# Altium PCB UNO-TH_Rev3e.PcbDoc
Units mil, origin at the board's own origin, x right, y up, seen from the top; angles counter-clockwise.
Board outline 2700 x 2100 mil, 2 copper layers (Top, Bottom); 116 components, 62 nets, 312 pads, 82 vias.
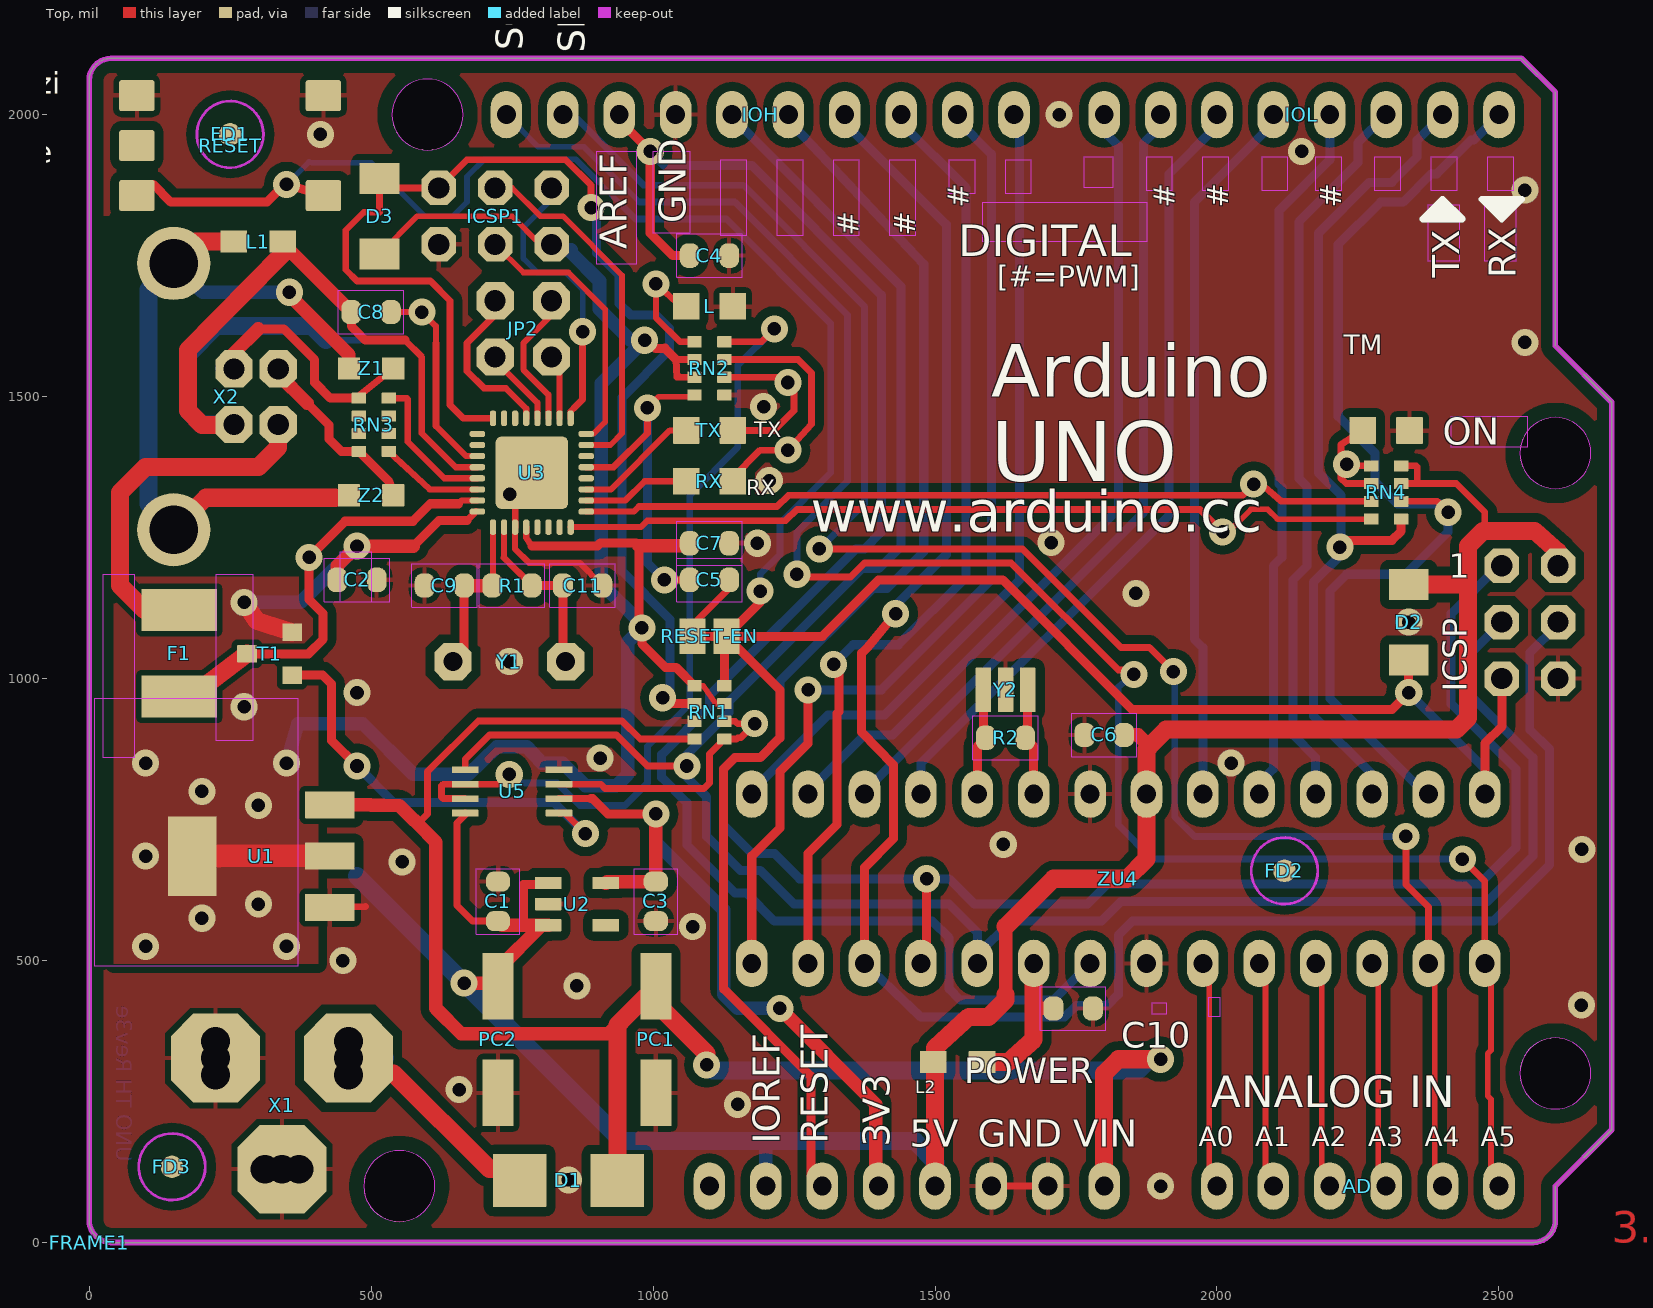
[diagram p0: Top view]
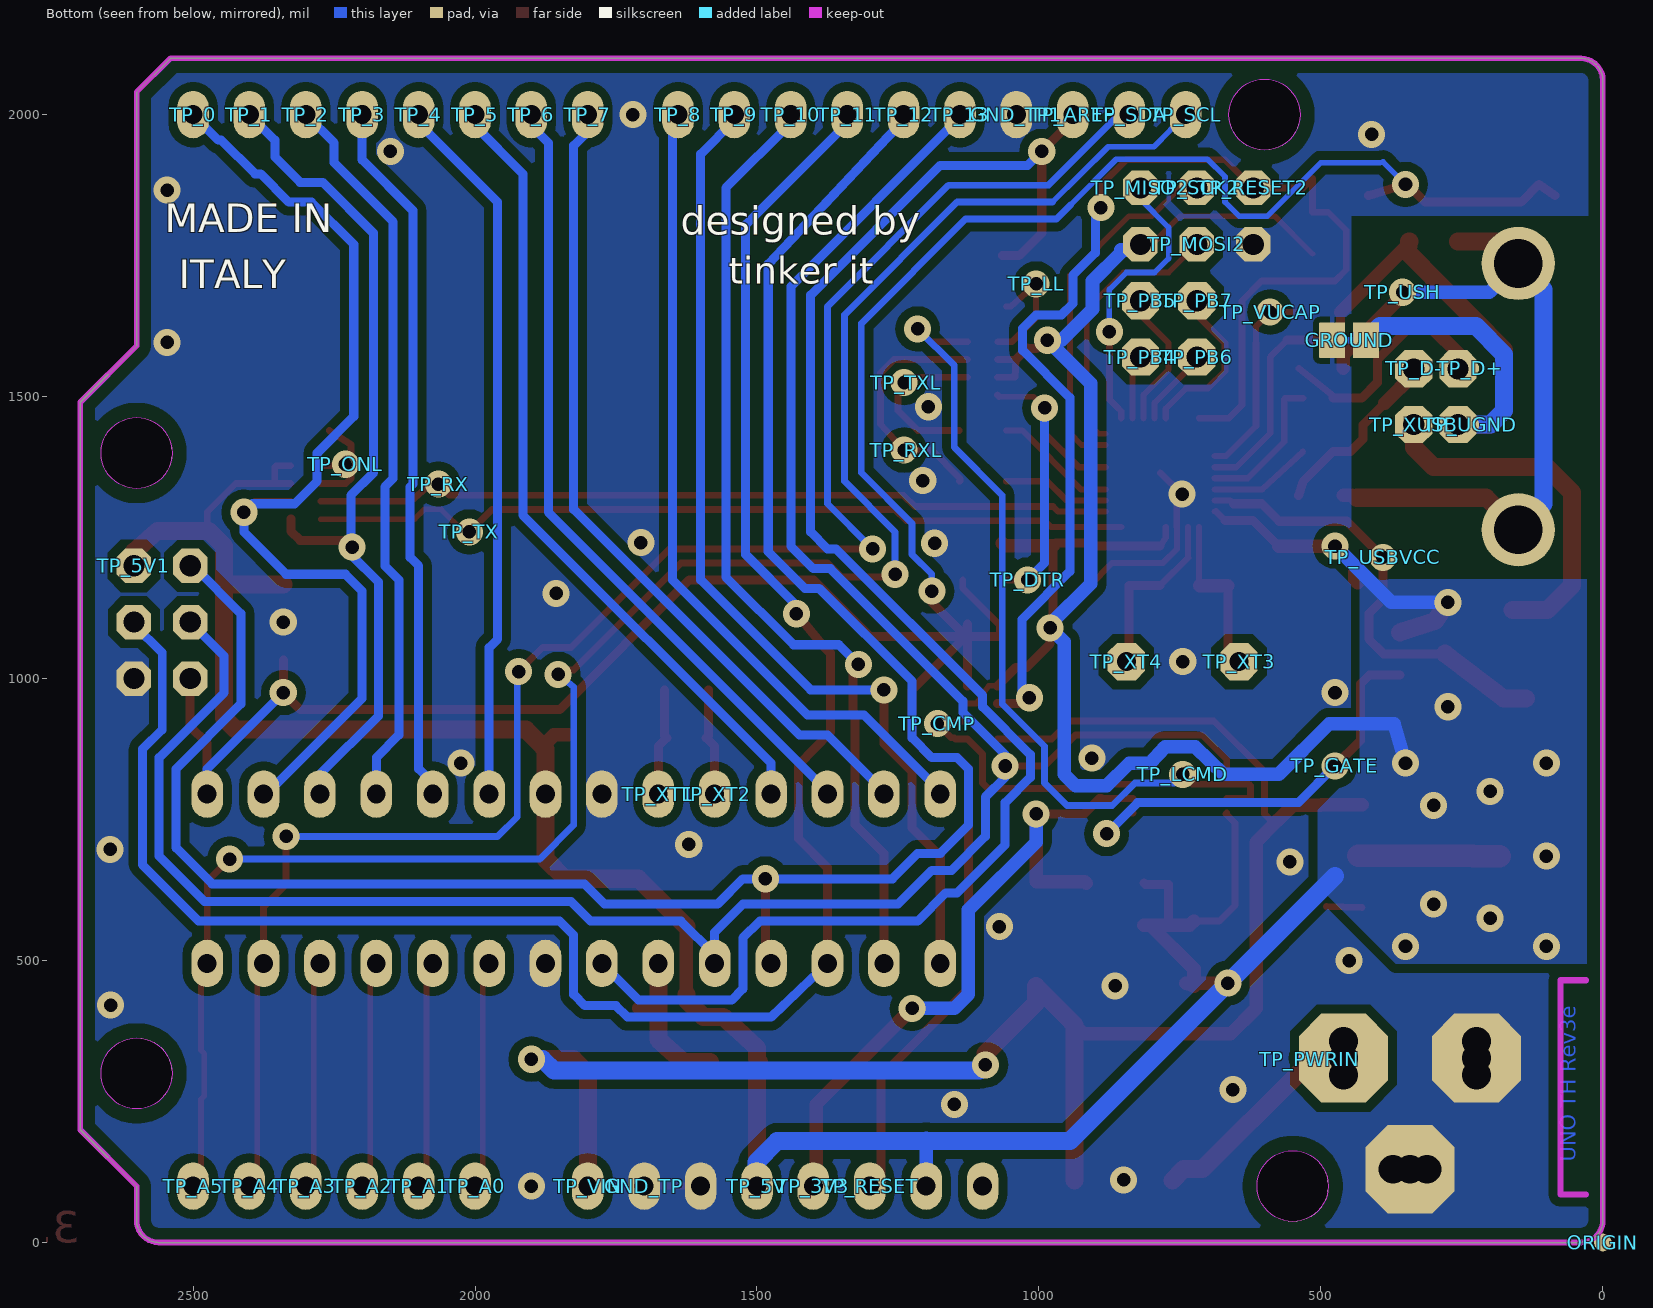
[diagram p1: Bottom view, seen from below]

## Layer stack, top to bottom
Top Solder: solder mask 0.4, Solder Resist, Dk 3.5
Top: signal copper 1.378
Dielectric 1: dielectric 12.6, FR-4, Dk 4.8
Bottom: signal copper 1.378
Bottom Solder: solder mask 0.4, Solder Resist, Dk 3.5

## Board outline
2540,2100 2600,2040 2600,1590 2700,1490 2700,200 2600,100 2600,39.37 cw(c2560.63,39.37) 2560.63,0 39.37,0 cw(c39.37,39.37) 0,39.37 0,2060.63 cw(c39.37,2060.63) 39.37,2100
cut-out: 600,1937.01 ccw(c600,2000) 662.99,2000 ccw(c600,2000) 600,2062.99 ccw(c600,2000) 537.01,2000 ccw(c600,2000)
cut-out: 550,37.01 ccw(c550,100) 612.99,100 ccw(c550,100) 550,162.99 ccw(c550,100) 487.01,100 ccw(c550,100)
cut-out: 2600,1337.01 ccw(c2600,1400) 2662.99,1400 ccw(c2600,1400) 2600,1462.99 ccw(c2600,1400) 2537.01,1400 ccw(c2600,1400)
cut-out: 2600,237.01 ccw(c2600,300) 2662.99,300 ccw(c2600,300) 2600,362.99 ccw(c2600,300) 2537.01,300 ccw(c2600,300)

## Design rules (kind name [scope] priority, off if disabled: settings)
BoardOutlineClearance mdCopperDimension [All] p1: gap=10 ignorepadtopadclearanceinfootprint=FALSE except(0: Arc-SplitContinuation Track-SplitContinuation SMDPad-SplitContinuation THPad-SplitContinuation Via-SplitContinuation Fill-SplitContinuation Poly-SplitContinuation Region-SplitContinuation Text-SplitContinuation; 26: Poly-OutlineEdge Poly-CavityEdge Poly-CutoutEdge Poly-SplitBarrior)
Clearance Clearance_for_PolygonClass_Isolate_16 [InPolygonClass('Isolate_16') vs IsArc Or IsTrack Or IsPad Or IsVia Or IsFill Or IsRegion Or IsText] p1: gap=16 ignorepadtopadclearanceinfootprint=FALSE
Clearance "Clearance (Same Net)" [All] p2: gap=10 ignorepadtopadclearanceinfootprint=FALSE except(8: SMDPad-SMDPad SMDPad-THPad SMDPad-Via)
Clearance Clearance_for_NetClass_aref [InNetClass('aref') vs InNetClass('aref')] p3: gap=10 ignorepadtopadclearanceinfootprint=FALSE
Clearance Clearance_for_NetClass_usbvcc [InNetClass('usbvcc') vs InNetClass('usbvcc')] p4: gap=10 ignorepadtopadclearanceinfootprint=FALSE
Clearance Clearance_for_NetClass_gnd [InNetClass('gnd') vs InNetClass('gnd')] p5: gap=10 ignorepadtopadclearanceinfootprint=FALSE
Clearance Clearance_for_NetClass_power [InNetClass('power') vs InNetClass('power')] p6: gap=10 ignorepadtopadclearanceinfootprint=FALSE
Clearance [All] p7: gap=10 ignorepadtopadclearanceinfootprint=FALSE except(12: THPad-Via Via-Via)
HoleSize HoleSize_For_NetClass_aref [InNetClass('aref')] p1: absolutevalues=TRUE maxlimit=24 minlimit=24 maxpercent=80.000 minpercent=20.000
HoleSize HoleSize_For_NetClass_usbvcc [InNetClass('usbvcc')] p2: absolutevalues=TRUE maxlimit=24 minlimit=24 maxpercent=80.000 minpercent=20.000
HoleSize HoleSize_For_NetClass_gnd [InNetClass('gnd')] p3: absolutevalues=TRUE maxlimit=22 minlimit=22 maxpercent=80.000 minpercent=20.000
HoleSize HoleSize_For_NetClass_power [InNetClass('power')] p4: absolutevalues=TRUE maxlimit=24 minlimit=24 maxpercent=80.000 minpercent=20.000
HoleSize [All] p5: absolutevalues=TRUE maxlimit=100000 minlimit=22 maxpercent=80.000 minpercent=20.000
HoleToHoleClearance mdDrill [All] p1: gap=12 allowstackedmicrovias=TRUE
MinimumSolderMaskSliver [All] p1 off: minsoldermaskwidth=10
PasteMaskExpansion Expansion_SMDPaste_OFF [InPadClass('SMDPaste_OFF')] p1: expansion=0
PasteMaskExpansion mlMinCreamFrame [All] p2: expansion=-2
PolygonConnect PolygonConnect_For_PolygonThermal_ON_Width80000_Gap100000 [InPolygonClass('PolygonThermal_ON_Width80000_Gap100000') vs Not IsVia] p1: connectstyle=Relief reliefconductorwidth=8 reliefentries=4 polygonreliefangle="90 Angle" airgapwidth=10
PolygonConnect PolygonConnect_For_PolygonThermal_OFF [InPolygonClass('PolygonThermal_OFF')] p2: connectstyle=Direct reliefconductorwidth=10 reliefentries=4 polygonreliefangle="90 Angle" airgapwidth=10
PolygonConnect ThermalVias [IsVia] p3: connectstyle=Direct reliefconductorwidth=10 reliefentries=4 polygonreliefangle="90 Angle" airgapwidth=10
PolygonConnect [All] p4: connectstyle=Relief reliefconductorwidth=10 reliefentries=4 polygonreliefangle="90 Angle" airgapwidth=10
RoutingVias [All] p1: holewidth=22 width=46 viastyle="Through Hole" minholewidth=22 minwidth=46 maxholewidth=100 maxwidth=100
SolderMaskExpansion Expansion_SMDSolder_OFF [InPadClass('SMDSolder_OFF')] p1: expansion=0 istentingtop=FALSE
SolderMaskExpansion mlMinStopFrame [All] p2: expansion=1 istentingtop=FALSE
Width Width_For_NetClass_aref [InNetClass('aref')] p1: maxlimit=32 minlimit=10 preferedwidth=16
Width Width_For_NetClass_usbvcc [InNetClass('usbvcc')] p2: maxlimit=40 minlimit=10 preferedwidth=20
Width Width_For_NetClass_gnd [InNetClass('gnd')] p3: maxlimit=24 minlimit=10 preferedwidth=12
Width Width_For_NetClass_power [InNetClass('power')] p4: maxlimit=48 minlimit=10 preferedwidth=24
Width [All] p5: maxlimit=10 minlimit=10 preferedwidth=10
26 further rules are at their usual default settings.

## Classes and differential pairs
polygon class PolygonThermal_ON_Width80000_Gap100000: Polygon_1_Net_GND Polygon_2_Net_GND
polygon class PolygonThermal_OFF: Polygon_1_Net_+5V Polygon_2_Net_+5V
polygon class Isolate_16: Polygon_1_Net_+5V Polygon_1_Net_GND Polygon_2_Net_GND
pad class SMDSolder_OFF: U3-33
pad class SMDPaste_OFF: GND_TP1-X GND_TP-X ORIGIN-X RESET-5 TP_0-X TP_1-X TP_2-X TP_3-X TP_3V3-X TP_4-X TP_5-X TP_5V1-X TP_5V-X TP_6-X TP_7-X TP_8-X TP_9-X TP_10-X TP_11-X TP_12-X TP_13-X TP_A0-X TP_A1-X TP_A2-X TP_A3-X TP_A4-X TP_A5-X TP_AREF-X TP_CMP-X TP_D+-X TP_D--X TP_DTR-X TP_GATE-X TP_LCMD-X TP_LL-X TP_MISO2-X TP_MOSI2-X TP_ONL-X TP_PB4-X TP_PB5-X TP_PB6-X TP_PB7-X TP_PWRIN-X TP_RESET2-X TP_RESET-X TP_RX-X TP_RXL-X TP_SCK2-X TP_SCL-X TP_SDA-X TP_TX-X TP_TXL-X TP_UGND-X TP_USBVCC-X TP_USH-X TP_VIN-X TP_VUCAP-X TP_XT1-X TP_XT2-X TP_XT3-X TP_XT4-X TP_XUSB-X U3-33
net class aref: AREF
net class usbvcc: +5V USBVCC XUSB
net class gnd: GND UGND USHIELD
net class power: PWRIN VIN

## Components (designator, comment, footprint, x,y, rotation, side; value= is the part's Value field where it differs from the comment)
AD "6x1F-H8.5" 1X06 2250,100 r0 top
C1 "100n" C0603-ROUND 725,605 r270 top
C2 "100n" C0603-ROUND 475,1175 r180 top
C3 "1u" C0603-ROUND 1005,605 r90 top
C4 "100n" C0603-ROUND 1100,1750 r180 top
C5 "100n" C0603-ROUND 1100,1175 r0 top
C6 "100n" C0603-ROUND 1800,900 r0 top
C7 "100n" C0603-ROUND 1100,1240 r0 top
C8 "1u" C0603-ROUND 500,1650 r180 top
C9 "22p" C0603-ROUND 630,1165 r180 top
C10 "100n" C0603-ROUND 1745,415 r180 top
C11 "22p" C0603-ROUND 875,1165 r0 top
D1 "M7" SMB 850,110 r180 top
D2 "CD1206-S01575" MINIMELF 2340,1100 r270 top
D3 "CD1206-S01575" MINIMELF 515,1820 r90 top
F1 "MF-MSMF050-2 500mA" L1812 160,1045 r90 top
FD1 "" FIDUCIA-MOUNT 250,1965 r0 top
FD2 "" FIDUCIA-MOUNT 2119.69,659.09 r0 top
FD3 "" FIDUCIA-MOUNT 146.85,134.25 r0 top
FRAME1 "" FRAME 0,0 r0 top
GND_TP "" TP-SP 1700,100 r0 top
GND_TP1 "" TP-SP 1040,2000 r0 top
GROUND "" SJ 450,1600 r180 bottom
ICSP "3x2 M" 2X03 2555,1100 r270 top
ICSP1 "3x2 M" 2X03 720,1820 r180 top
IOH "10x1F-H8.5" 1X10 1190,2000 r180 top
IOL "8x1F-H8.5" 1X08 2150,2000 r180 top
JP2 "2x2 M - NM" 2X02 770,1620 r90 top
L "YELLOW" CHIP-LED0805 1100,1660 r270 top
L1 "BLM21" 0805 300,1775 r180 top
L2 "10uH" 0805 1540,320 r0 top
ON "GREEN" CHIP-LED0805 2300,1440 r270 top
ORIGIN "" TP-SP 0,0 r0 top
PC1 "47u" PANASONIC_D 1005,360 r90 top
PC2 "47u" PANASONIC_D 725,360 r90 top
POWER "8x1F-H8.5" 1X08 1450,100 r0 top
R1 "1M" R0603-ROUND 750,1165 r0 top
R2 "1M" R0603-ROUND 1625,895 r180 top
RESET "TS42031-160R-TR-7260" TS42 250,1945 r0 top
RESET-EN "" SJ 1100,1075 r0 top
RN1 "10K" CAY16 1100,940 r90 top
RN2 "1K" CAY16 1100,1550 r270 top
RN3 "22R" CAY16 505,1450 r90 top
RN4 "1K" CAY16 2300,1330 r90 top
RX "YELLOW" CHIP-LED0805 1100,1350 r90 top
T1 "FDN340P" SOT-23 320,1045 r270 top
TP_0 "" TP-SP 2500,2000 r0 top
TP_1 "" TP-SP 2400,2000 r0 top
TP_2 "" TP-SP 2300,2000 r0 top
TP_3 "" TP-SP 2200,2000 r0 top
TP_3V3 "" TP-SP 1400,100 r0 top
TP_4 "" TP-SP 2100,2000 r0 top
TP_5 "" TP-SP 2000,2000 r0 top
TP_5V "" TP-SP 1500,100 r0 top
TP_5V1 "" TP-SP 2605,1200 r0 top
TP_6 "" TP-SP 1900,2000 r0 top
TP_7 "" TP-SP 1800,2000 r0 top
TP_8 "" TP-SP 1640,2000 r0 top
TP_9 "" TP-SP 1540,2000 r0 top
TP_10 "" TP-SP 1440,2000 r0 top
TP_11 "" TP-SP 1340,2000 r0 top
TP_12 "" TP-SP 1240,2000 r0 top
TP_13 "" TP-SP 1140,2000 r0 top
TP_A0 "" TP-SP 2000,100 r0 top
TP_A1 "" TP-SP 2100,100 r0 top
TP_A2 "" TP-SP 2200,100 r0 top
TP_A3 "" TP-SP 2300,100 r0 top
TP_A4 "" TP-SP 2400,100 r0 top
TP_A5 "" TP-SP 2500,100 r0 top
TP_AREF "" TP-SP 940,2000 r0 top
TP_CMP "" TP-SP 1180,920 r0 top
TP_D+ "" TP-SP 235,1550 r0 top
TP_D- "" TP-SP 335,1550 r0 top
TP_DTR "" TP-SP 1020,1175 r0 top
TP_GATE "" TP-SP 475,845 r0 top
TP_LCMD "" TP-SP 745,830 r0 top
TP_LL "" TP-SP 1005,1700 r0 top
TP_MISO2 "" TP-SP 820,1870 r0 top
TP_MOSI2 "" TP-SP 720,1770 r0 top
TP_ONL "" TP-SP 2230,1380 r0 top
TP_PB4 "" TP-SP 820,1570 r0 top
TP_PB5 "" TP-SP 820,1670 r0 top
TP_PB6 "" TP-SP 720,1570 r0 top
TP_PB7 "" TP-SP 720,1670 r0 top
TP_PWRIN "" TP-SP 520,325 r0 top
TP_RESET "" TP-SP 1300,100 r0 top
TP_RESET2 "" TP-SP 620,1870 r0 top
TP_RX "" TP-SP 2065,1345 r0 top
TP_RXL "" TP-SP 1235,1405 r0 top
TP_SCK2 "" TP-SP 720,1870 r0 top
TP_SCL "" TP-SP 740,2000 r0 top
TP_SDA "" TP-SP 840,2000 r0 top
TP_TX "" TP-SP 2010,1260 r0 top
TP_TXL "" TP-SP 1235,1525 r0 top
TP_UGND "" TP-SP 235,1450 r0 top
TP_USBVCC "" TP-SP 390,1215 r0 top
TP_USH "" TP-SP 355,1685 r0 top
TP_VIN "" TP-SP 1800,100 r0 top
TP_VUCAP "" TP-SP 590,1650 r0 top
TP_XT1 "" TP-SP 1675,795 r0 top
TP_XT2 "" TP-SP 1575,795 r0 top
TP_XT3 "" TP-SP 645,1030 r0 top
TP_XT4 "" TP-SP 845,1030 r0 top
TP_XUSB "" TP-SP 335,1450 r0 top
TX "YELLOW" CHIP-LED0805 1100,1440 r90 top
U1 "NCP1117ST50T3G" SOT223 305,685 r90 top
U2 "LP2985-33DBVR" SOT23-DBV 865,600 r270 top
U3 "ATMEGA16U2-MU(R)" MLF32 785,1365 r90 top
U5 "LMV358IDGKR" MSOP08 750,800 r90 top
X1 "POWERSUPPLY_DC21MMX" POWERSUPPLY_DC-21MM 210,330 r90 top
X2 "USB-B_TH" PN61729 150,1500 r270 top
Y1 "16MHz" QS 745,1030 r180 top
Y2 "CSTCE16M0V53-R0 16MHZ" RESONATOR 1625,980 r0 top
Z1 "CG0603MLC-05E" CT/CN0603 500,1550 r180 top
Z2 "CG0603MLC-05E" CT/CN0603 500,1325 r180 top
ZU4 "ATMEGA328P-PU" DIL28-3 1825,645 r180 top

## Footprints (in the part's own frame and the unit in brackets; to place one, negate y for a bottom-side part, rotate by r counter-clockwise, add the part's x,y. Pads: shape width x height; smd on the part's side, far side on the other; paste and mask are expansions set on the pad)
1X06 [mil] "1X06"
  oval 56x84 hole 33.46: 1(-250,0) 2(-150,0) 3(-50,0) 4(50,0) 5(150,0) 6(250,0)
1X08 [mil] "1X08"
  oval 56x84 hole 33.46: 1(-350,0) 2(-250,0) 3(-150,0) 4(-50,0) 5(50,0) 6(150,0) 7(250,0) 8(350,0)
1X10 [mil] "1X10"
  oval 56x84 hole 33.46: 1(-450,0) 2(-350,0) 3(-250,0) 4(-150,0) 5(-50,0) 6(50,0) 7(150,0) 8(250,0) 9(350,0) 10(450,0)
2X02 [mil] "2X02"
  oct 66x66 / inner round 60.98 / far side oct 66x66 hole 37.4: 1(-50,-50) 2(-50,50) 3(50,-50) 4(50,50)
2X03 [mil] "2X03"
  oct 61.02x61.02 / inner round 56.38 / far side oct 61.02x61.02 hole 37.4: 1(-100,-50) 2(-100,50) 3(0,-50) 4(0,50) 5(100,-50) 6(100,50)
0805 [mm] "0805"
  rrect5% 1.2x1 smd: 1(-1.1,0) 2(1.1,0)
C0603-ROUND [mil] "C0603-ROUND"
  rrect80% 35.37x43.31 smd: 1(-35,0) 2(35,0)
  Top keep-out lines w2: 57.99,-38.7 -57.99,-38.7 -57.99,38.7 57.99,38.7 57.99,-38.7
CAY16 [mm] "CAY16"
  rrect10% 0.5x0.65 smd: 1(-1.2,-0.675) 2(-0.4,-0.675) 3(0.4,-0.675) 4(1.2,-0.675) 5(1.2,0.675) 6(0.4,0.675) 7(-0.4,0.675) 8(-1.2,0.675)
CHIP-LED0805 [mil] "CHIP-LED0805"
  rrect4% 47.24x47.24 smd: A(0,-41.34) C(0,41.34)
CT/CN0603 [mm] "CT/CN0603"
  rrect5% 1x1 smd: 1(-1,0) 2(1,0)
DIL28-3 [mil] "DIL28-3"
  oval 56x84 hole 33.46: 1(-650,-150) 2(-550,-150) 3(-450,-150) 4(-350,-150) 5(-250,-150) 6(-150,-150) 7(-50,-150) 8(50,-150) 9(150,-150) 10(250,-150) 11(350,-150) 12(450,-150) 13(550,-150) 14(650,-150) 15(650,150) 16(550,150) 17(450,150) 18(350,150) 19(250,150) 20(150,150) 21(50,150) 22(-50,150) 23(-150,150) 24(-250,150) 25(-350,150) 26(-450,150) 27(-550,150) 28(-650,150)
FIDUCIA-MOUNT [mil] "FIDUCIA-MOUNT"
  rrect100% 40x40 smd: P$1(0,0)
  Top keep-out circle w5: c0,0 r59.06
FRAME [mil] "FRAME"
L1812 [mil] "L1812"
  rrect2% 74.8x133.86 smd: 1(-76.77,0) 2(76.77,0)
MINIMELF [mil] "MINIMELF"
  rrect3% 55.12x70.87 smd: A(66.93,0) C(-66.93,0)
MLF32 [mil] "MLF32"
  rrect80% 27.56x11.02 smd: 1(-96.46,68.9) 2(-96.46,49.21) 3(-96.46,29.53) 4(-96.46,9.84) 5(-96.46,-9.84) 6(-96.46,-29.53) 7(-96.46,-49.21) 8(-96.46,-68.9) 17(96.46,-68.9) 18(96.46,-49.21) 19(96.46,-29.53) 20(96.46,-9.84) 21(96.46,9.84) 22(96.46,29.53) 23(96.46,49.21) 24(96.46,68.9)
  rrect80% 11.02x27.56 smd: 9(-68.9,-96.46) 10(-49.21,-96.46) 11(-29.53,-96.46) 12(-9.84,-96.46) 13(9.84,-96.46) 14(29.53,-96.46) 15(49.21,-96.46) 16(68.9,-96.46) 25(68.9,96.46) 26(49.21,96.46) 27(29.53,96.46) 28(9.84,96.46) 29(-9.84,96.46) 30(-29.53,96.46) 31(-49.21,96.46) 32(-68.9,96.46)
  rrect15% 128.11x128.11 smd paste+0 mask+0: 33(0,0)
MSOP08 [mil] "MSOP08"
  rrect16% 11.81x47.24 smd: 1(-38.43,-83.19) 2(-12.83,-83.19) 3(12.76,-83.19) 4(38.35,-83.19) 5(38.35,83.15) 6(12.76,83.15) 7(-12.83,83.15) 8(-38.43,83.15)
PANASONIC_D [mm] "PANASONIC_D"
  rrect3% 3x1.4 smd: +(2.4,0) -(-2.4,0)
PN61729 [mil] "PN61729"
  oct 66x66 / inner round 60.98 / far side oct 66x66 hole 37.4: 1(49.21,185.43) 2(-49.21,185.43) 3(-49.21,106.69) 4(49.21,106.69)
  round 129.91 hole 86.61: P$1(-236.22,0) P$2(236.22,0)
POWERSUPPLY_DC-21MM [mil] "POWERSUPPLY_DC-21MM"
  oct 157.48x157.48 / inner round 145.49 / far side oct 157.48x157.48 hole 51.18: 1(-200,-132) 2(-3,-250) 3(-3,-14)
  round 76.77 hole 51.18: 4(-200,-162) 5(-200,-102) 6(-33,-14) 7(27,-14) 8(-33,-250) 9(27,-250)
QS [mil] "QS"
  oct 66x66 / inner round 60.98 / far side oct 66x66 hole 33.46: 1(-100,0) 2(100,0)
R0603-ROUND [mil] "R0603-ROUND"
  rrect80% 35.37x43.31 smd: 1(-35,0) 2(35,0)
  Top keep-out lines w2: -57.99,-38.7 57.99,-38.7 57.99,38.7 -57.99,38.7 -57.99,-38.7
RESONATOR [mm] "RESONATOR"
  rrect7% 0.7x2 smd: 1(-1,0) 2(0,0) 3(1,0)
SJ [mil] "SJ"
  rrect4% 46x63 smd: 1(-30,0) 2(30,0)
SMB [mil] "SMB"
  rrect2% 94.49x94.49 smd: A(86.61,0) C(-86.61,0)
SOT23-DBV [mil] "SOT23-DBV"
  rrect9% 21.65x47.24 smd: 1(-37.4,-51.18) 2(0,-51.18) 3(37.4,-51.18) 4(37.4,51.18) 5(-37.4,51.18)
SOT223 [mil] "SOT223"
  rrect4% 48x88 smd: 1(-91,-122) 2(0,-122) 3(91,-122)
  rrect2% 141.73x86.61 smd: 4(0,122.01)
SOT-23 [mil] "SOT-23"
  rrect6% 31x35 smd: 1(1,-40) 2(-37,40) 3(39,40)
TP-SP [mil] "TP-SP"
  rrect100% 31.5x31.5 smd far side paste+0: X(0,0)
TS42 [mil] "TS42"
  rrect15% 62.99x55.12 smd: 1(-165.35,88.58) 2(165.35,88.58) 3(-165.35,-88.58) 4(165.35,-88.58)
  rrect15% 62.99x55.12 smd paste+0: 5(-165.35,0)

## Part data
AD: library part 1X06, PackageName=1X06
C1 C2 C3 C4 C5 C6 C7 C8 C9 C10 C11: library part C0603-ROUND, PackageName=C0603-ROUND
D1: library part SMB, PackageName=SMB
D2 D3: library part MINIMELF, PackageName=MINIMELF
F1: library part L1812, PackageName=L1812
FD1 FD2 FD3: library part FIDUCIA-MOUNT, PackageName=FIDUCIA-MOUNT
FRAME1: library part FRAME, PackageName=FRAME
GND_TP GND_TP1 ORIGIN TP_0 TP_1 TP_2 TP_3 TP_3V3 TP_4 TP_5 TP_5V TP_5V1 TP_6 TP_7 TP_8 TP_9 TP_10 TP_11 TP_12 TP_13 TP_A0 TP_A1 TP_A2 TP_A3 TP_A4 TP_A5 TP_AREF TP_CMP TP_D+ TP_D- TP_DTR TP_GATE TP_LCMD TP_LL TP_MISO2 TP_MOSI2 TP_ONL TP_PB4 TP_PB5 TP_PB6 TP_PB7 TP_PWRIN TP_RESET TP_RESET2 TP_RX TP_RXL TP_SCK2 TP_SCL TP_SDA TP_TX TP_TXL TP_UGND TP_USBVCC TP_USH TP_VIN TP_VUCAP TP_XT1 TP_XT2 TP_XT3 TP_XT4 TP_XUSB: library part TP-SP, PackageName=TP-SP
GROUND RESET-EN: library part SJ, PackageName=SJ
ICSP ICSP1: library part 2X03, PackageName=2X03
IOH: library part 1X10, PackageName=1X10
IOL POWER: library part 1X08, PackageName=1X08
JP2: library part 2X02, PackageName=2X02
L ON RX TX: library part CHIP-LED0805, PackageName=CHIP-LED0805
L1 L2: library part 0805, PackageName=0805
PC1 PC2: library part PANASONIC_D, PackageName=PANASONIC_D
R1 R2: library part R0603-ROUND, PackageName=R0603-ROUND
RESET: library part TS42, PackageName=TS42
RN1 RN2 RN3 RN4: library part CAY16, PackageName=CAY16
T1: library part SOT-23, PackageName=SOT-23
U1: library part SOT223, PackageName=SOT223
U2: library part SOT23-DBV, PackageName=SOT23-DBV
U3: library part MLF32, PackageName=MLF32
U5: library part MSOP08, PackageName=MSOP08
X1: library part POWERSUPPLY_DC-21MM, PackageName=POWERSUPPLY_DC-21MM
X2: library part PN61729, PackageName=PN61729
Y1: library part QS, PackageName=QS
Y2: library part RESONATOR, PackageName=RESONATOR
Z1 Z2: library part CT/CN0603, PackageName=CT/CN0603
ZU4: library part DIL28-3, PackageName=DIL28-3

## Free pads (board coordinates)
  round 125.98 hole 125.98 unplated: MH1(2600,1400) MH2(2600,300) MH3(600,2000) MH4(550,100)

## Via types
v1: diameter 48/48 (per signal layer), hole 24, Top to Bottom, 82 vias

## Nets (pads, with @x,y where several pads share a name; then routed paths per layer and width w, separated by ;. In a path a pad name is that pad's centre, name@x,y a point inside that pad or via, vN(x,y) a via of type N, cw(c..) or ccw(c..) an arc to the next point about the centre after c; other vN are vias at no path point)
5-GND: RESET.5
+3V3: C3.2 POWER.4 TP_3V3.X U2.5 U5.2 | length 1260.5
  Top w12: U5.2 890.2,787.17
  Top w16: 890.2,787.17 892.83,787.17 920,760 v1(1005,760)
  Top w24: U2.5 918.78,640 C3.2 v1(1005,760) ; v1(1225,415) 1395,245 1395,105 POWER.4
  Bottom w24: v1(1005,760) 1005,710 1125,590 1125,440 1150,415 v1(1225,415)
+5V: C1.2 C2.2 C6.2 C7.1 D2.C D3.C ICSP1.2 ICSP.2 L2.1 PC2.+ POWER.2 POWER.5 RN1.3 RN1.5 RN2.2 RN2.3 RN4.3 RN4.4 T1.2 TP_5V1.X TP_5V.X U1.2 U1.4 U2.1 U2.3 U3.4 U3.32 U5.8 ZU4.7 | length 8643.3
  Top w10: D3.C 581.93,1820 750,1820 800,1770 ICSP1.2 ; RN1.5@1075.67,985 RN1.5 1088.76,987.24 1111.25,955.75 RN1.3
  Top w11: U3.32@686.1,1296.1 U3.32 ; U3.4 775.16,1249.84 785,1235
  Top w12: U5.8 668.43,760 652.5,744.07 652.5,597.5 680,570 C1.2 ; 670,1280 U3.32@686.1,1296.1 ; RN2.3 1042.24,1534.25 1040.75,1565.75 RN2.2 ; RN4.3 2355,1345.75 ; RN4.4 2352.76,1377.24 2355,1375 2355,1345.75 ; 2475,1262 2475,1295 2424.25,1345.75 2355,1345.75
  Top w16: 575,1235 620,1280 670,1280 ; 770,562.6 770,635 811.42,635 U2.1 ; 785,1235 901.07,1235 906.61,1240.54 970,1240.54 975,1235.54 975,1110 v1(980,1090) 980,1061.93 1021.93,1020 1040.67,1020 RN1.5 ; v1(985,1600) 1005,1585 1020.75,1585.75 1040.75,1565.75
  Top w20: U1.2 U1.2@434,686 ; ICSP.2@2600,1200 ICSP.2
  Top w24: C2.2@435,1170 C2.2 440,1200 v1(475,1235) 575,1235 ; v1(665,460) 739.49,460 PC2.+ 725,485 802.6,562.6 U2.3 770,562.6 732.4,562.6 C1.2 ; 975,1235.54 1060.54,1235.54 C7.1 ; 1625,440 1625,560 ; C6.2 1860,900 1880,880
  Top w32: v1(275,1135) 298,1102 T1.2 ; POWER.5 1500,316.69 L2.1 1500,326.69 1500,345 1560,400 1595,400 1625,430 1625,440 ; 1625,560 1710,645 1840,645 1875,680 ZU4.7 1875,875 1880,880 1910,910 2425,910 2445,930 2445,1160 ; D2.C 2438.07,1166.93 2445,1160 ; ICSP.2@2605,1198.54 ICSP.2 2605,1225 2563,1262 2475,1262 2472,1262 2445,1235 2445,1160
  Top w40: U1.4 230,685 231,686 U1.2@434,686
  Bottom w24: v1(275,1135) 375,1135 v1(475,1235) ; v1(350,850) 370,920 485,920 575,830 672,830 723,879 776,879 803,850 840,850 880,810 935,810 955,830 955,1065 v1(980,1090) 980,1096.6 908.3,1168.3 908.3,1523.3 v1(985,1600) 960,1600 905,1655 905,1705 855,1755 855,1760 830,1760 ICSP1.2 ; POWER.2 1200,185 1205,180
  Bottom w32: 475,650 v1(665,460) 945,180 1205,180 1464,180 1501,143 POWER.5
  other v1: 100,525 350,525 200,575 300,600 100,685 300,775 200,800 100,850 275,950
AD0: AD.1 TP_A0.X ZU4.23 | length 403.2
  Top w10: ZU4.23 1986,479 1986,118 AD.1
AD1: AD.2 TP_A1.X ZU4.24 | length 403.2
  Top w10: ZU4.24 2086,479 2086,118 AD.2
AD2: AD.3 TP_A2.X ZU4.25 | length 403.2
  Top w10: ZU4.25 2186,479 2186,118 AD.3
AD3: AD.4 TP_A3.X ZU4.26 | length 403.2
  Top w10: ZU4.26 2286,479 2286,118 AD.4
AD4/SDA: AD.5 IOH.9 TP_A4.X TP_SDA.X ZU4.27 | length 3192.3
  Top w10: ZU4.27 2386,479 2386,118 AD.5
  Top w12: v1(1295,1230) 1655,1230 1830,1055 1880,1055 v1(1922.5,1012.5) v1@1930,1010 ; v1(2335,720) 2335,635 2375,595 ZU4.27
  Bottom w12: IOH.9 858,2000 983,1875 1160,1875 1375,1660 1375,1310 v1(1295,1230) ; v1(1922.5,1012.5) 1925,1010 1925,755 1960,720 v1(2335,720)
AD5/SCL: AD.6 IOH.10 TP_A5.X TP_SCL.X ZU4.28 | length 3469.1
  Top w10: ZU4.28 2486,479 2486,341 2480,335 2480,260 2486,254 2486,118 AD.6
  Top w12: v1(1255,1185) 1255,1180 1350,1180 1375,1205 1635,1205 1825,1015 1845,1015 v1(1852.5,1007.5) ; v1(2435,680) 2475,640 ZU4.28
  Bottom w10: IOH.10 796,1943 877,1943 976,1845
  Bottom w12: 976,1845 1145,1845 1345,1645 1345,1350 1255,1260 v1(1255,1185) ; v1(1852.5,1007.5) 1825,985 1825,740 1885,680 v1(2435,680)
AREF: C4.2 IOH.8 TP_AREF.X ZU4.21 | length 2907.5
  Top w16: IOH.8 940,1990 v1(995,1935) 995,1790 1035,1750 C4.2
  Bottom w16: v1(995,1935) 1020,1910 1175,1910 1405,1680 1405,1260 1375,1230 1360,1230 1100,970 1100,950 1015,865 1015,825 1060,780 1060,705 1145,620 1165,620 1215,570 1495,570 1525,540 1525,450 1545,430 1710,430 ZU4.21
AVCC: C10.2 L2.2 ZU4.20 | length 276.9
  Top w24: 1675,415 C10.2
  Top w32: L2.2 1630,320 1675,360 1675,415 ZU4.20
CMP: RN1.1 RN1.2 TP_CMP.X U5.3 | length 482.8
  Top w12: U5.3 907.24,812.76 915,805 1090,805 1100,815 1100,866.18 RN1.1 1147.76,892.76 1150,895 1155,895 v1(1180,920) 1150,920 1145.75,924.25 RN1.2
D+: RN3.5 TP_D+.X X2.3 Z1.1 | length 447.6
  Top w12: RN3.5 476.18,1500 Z1.1
  Top w16: 300,1620 345,1620 400,1565 400,1525 427.76,1497.24 RN3.5
  Top w24: X2.3 256.69,1576.69 300,1620
  Bottom w24: TP_D+.X 255.91,1550 X2.3
D-: RN3.8 TP_D-.X X2.2 Z2.1 | length 325.7
  Top w16: 386.54,1488.46 425,1450 425,1425 447.24,1402.76 RN3.8 531.18,1350 Z2.1
  Top w24: X2.2 335.79,1539.21 386.54,1488.46
  Bottom w12: TP_D-.X 335,1549.65 X2.2
DTR: C5.1 RN2.4 TP_DTR.X U3.13 | length 633.7
  Top w10: v1(990,1480) 1010,1500 RN2.4@1070.67,1500
  Top w11: U3.13 929.84,1374.84
  Top w12: 929.84,1374.84 990,1435 v1(990,1480) ; v1(1020,1175) C5.1 ; RN2.4@1070.67,1500 RN2.4
  Bottom w16: v1(990,1480) 990,1205 v1(1020,1175)
GATE_CMD: T1.3 TP_GATE.X U5.1 | length 756.9
  Top w12: U5.1 843.43,761.57 v1(880,725)
  Top w16: T1.3 414,1006 430,990 430,890 v1(475,845)
  Bottom w16: v1(475,845) 540,780 825,780 v1(880,725)
GND: C1.1 C2.1 C3.1 C4.1 C6.1 C7.2 C9.2 C10.1 C11.2 GND_TP1.X GND_TP.X GROUND.1 ICSP1.6 ICSP.6 IOH.7 L.C ON.C PC1.- PC2.- POWER.6 POWER.7 RESET.1 RESET.2 RN1.7 RN2.5 U1.1 U2.2 U3.3 U3.33 U5.4 X1.1 X1.3 X1.4 X1.5 X1.6 X1.7 Y2.2 ZU4.8 ZU4.22 | length 557.5
  Top w11: U3.3@755,1270 755,1230 780,1205 870,1205 C11.2
  Top w12: U1.1 490,596 ; U3.3 755.47,1319.53 v1(746,1327) U3.33 ; POWER.6 POWER.7
  Bottom w12: 425,1600 GROUND.1
  other v1: 1900,100 850,111 1150,245 656,271 2646,421 865,455 450,500 1070,560 555,675 2647,697 1621,706 2025,850 906,859 475,975 745,1030 2340,1100 1856,1151 1185,1240 1706,1241 1206,1351 1196,1482 2546,1596 2546,1866 2150,1935 410,1965 1720,2000
IO0: IOL.1 RN4.2 TP_0.X ZU4.2 | length 1795.3
  Top w12: RN4.2 2390.75,1314.25 v1(2410,1295)
  Bottom w16: ZU4.2 2370,795 2200,965 2200,1155 2230,1185 2335,1185 2410,1260 v1(2410,1295) 2395,1310 2320,1310 2280,1350 2280,1400 2215,1465 2215,1770 2290,1845 2330,1845 2380,1895 2390,1895 2450,1955 2455,1955 IOL.1
IO1: IOL.2 RN4.1 TP_1.X ZU4.3 | length 1542.2
  Top w16: v1(2218,1233) 2230,1245 2310,1245 2326.57,1261.57 RN4.1
  Bottom w16: ZU4.3 2275,830 2171,934 2171,1171 2220,1220 2220,1225 v1(2218,1233) 2220,1235 2220,1325 2180,1365 2180,1790 2270,1880 2310,1880 2355,1925 2355,1955 IOL.2
IO2: IOL.3 TP_2.X ZU4.4 | length 1302.3
  Bottom w16: ZU4.4 2175,860 2135,900 2135,1175 2160,1200 2160,1340 2145,1355 2145,1810 2250,1915 2250,1950 IOL.3
IO3: IOL.4 TP_3.X ZU4.5 | length 1260.9
  Bottom w16: ZU4.5 2075,815 2100,840 2100,1200 2115,1215 2115,1340 2110,1345 2110,1830 2200,1920 IOL.4
IO4: IOL.5 TP_4.X ZU4.6 | length 1267.7
  Bottom w16: ZU4.6 1975,1055 1960,1070 1960,1845 2095,1980 IOL.5
IO5: IOL.6 TP_5.X ZU4.11 | length 1422.5
  Bottom w16: ZU4.11 1475,850 1915,1290 1915,1895 2000,1980 IOL.6
IO6: IOL.7 TP_6.X ZU4.12 | length 1422.5
  Bottom w16: ZU4.12 1375,800 1870,1295 1870,1950 1900,1980 IOL.7
IO7: IOL.8 TP_7.X ZU4.13 | length 1472.5
  Bottom w16: ZU4.13 1275,800 1375,900 1425,900 1825,1300 1825,1945 1800,1970 IOL.8
IO8: IOH.1 TP_8.X ZU4.14 | length 1484.5
  Bottom w16: ZU4.14 1175,800 1310,935 1410,935 1650,1175 1650,1990 1640,1980 IOH.1
IO9: IOH.2 TP_9.X ZU4.15 | length 1782
  Top w16: ZU4.15 1175,685 1225,735 1225,835 1275,885 v1(1275,980)
  Bottom w16: v1(1275,980) 1405,980 1600,1175 1600,1930 1540,1990 IOH.2
L13: RN2.8 TP_LCMD.X U5.6 U5.7 | length 1471.7
  Top w12: U5.7 627.83,787.17 625,790 625,810 627.76,812.76 U5.6 727.76,812.76 v1(745,830) ; RN2.8 1192.24,1597.24 v1(1215,1620)
  Bottom w12: v1(745,830) 760,815 830,815 870,775 950,775 990,815 990,880 1065,955 1065,1325 1150,1410 1150,1555 v1(1215,1620)
M8RXD: RN4.7 TP_RX.X U3.9 | length 1423.6
  Top w11: U3.9 966.1,1296.1 975,1305
  Top w12: 975,1305 1220,1305 1240,1325 2045,1325 v1(2065,1345) 2078.5,1345 2114.25,1314.25 RN4.7
M8TXD: RN4.8 TP_TX.X U3.8 | length 1472.8
  Top w10: v1(2010,1260) 2020,1260 2060,1300 2090,1300 2107.24,1282.76 RN4.8
  Top w11: U3.8 978.54,1268.54 990,1280
  Top w12: 990,1280 1235,1280 1255,1300 1970,1300 v1(2010,1260)
MISO: ICSP.1 IOH.5 TP_12.X ZU4.18 | length 3805.3
  Top w16: ZU4.18 1485,505 v1(1485,645)
  Bottom w16: IOH.5 1240,1990 1480,1735 1480,1225 1415,1160 1390,1160 1225,995 1225,895 1190,860 1145,860 1125,840 1125,740 1175,690 1215,690 1260,645 v1(1485,645) ; v1@1490,640 1490,635 v1(1485,645) ; ICSP.1 2498.03,1198.03 2415,1115 2415,955 2530,840 2530,700 2466,636 1806,636 1770,600 1570,600 1525,645 v1(1485,645)
MISO2: ICSP1.1 TP_MISO2.X U3.17 | length 570.8
  Top w10: 875,1555 v1(875,1615)
  Top w11: U3.17 853.9,1473.9 860,1480
  Top w12: 860,1480 875,1495 v1(875,1615)
  Bottom w10: ICSP1.1 820,1850 770,1800 770,1745 795,1720 845,1720 875,1690 v1(875,1615)
MOSI: ICSP.4 IOH.4 TP_11.X ZU4.17 | length 3575.1
  Top w16: ZU4.17 1375,665 1426,716 1426,847 1370,905 1370,1045 1380,1055 v1(1430,1115)
  Bottom w15: 2555,909 2555,1046
  Bottom w16: IOH.4 1340,1985 1520,1805 1520,1220 1430,1130 v1(1430,1115) ; ZU4.17 1475,400 1730,400 1750,420 1805,420 1825,440 1825,545 1850,570 2490,570 2590,670 2590,875 2555,909 ; 2555,1046 2605.51,1095.51 ICSP.4
MOSI2: ICSP1.4 TP_MOSI2.X U3.16 | length 484.9
  Top w10: ICSP1.4 770,1720 850,1720 915,1655 915,1455 893.9,1433.9 U3.16
N$1: L.A RN2.1 TP_LL.X | length 215
  Top w11: L.A 1050,1660 v1(1005,1700) 1005,1640 1047.76,1597.24 RN2.1
N$3: ON.A RN4.5 RN4.6 TP_ONL.X | length 221.2
  Top w12: ON.A 2220,1415 v1@2220,1390 ; RN4.6 2229.25,1345.75 2220,1355 v1@2220,1390 ; RN4.5 2242.76,1377.24 v1(2230,1380) v1@2220,1390
N$35: RN2.7 RX.A TP_RXL.X | length 443.6
  Top w12: RN2.7 1257.25,1565.75 1281,1542 1281,1451 v1(1239,1405) 1190,1405 1140,1355 1140,1350 RX.A
N$36: RN2.6 TP_TXL.X TX.A | length 292.2
  Top w12: RN2.6 1225.75,1534.25 v1(1239,1525) 1250,1510 1250,1475 1214.76,1439.76 1151.57,1439.76 TX.A
PB4: JP2.1 TP_PB4.X U3.18 | length 114.4
  Top w11: U3.18 JP2.1@834.21,1555.79
  Top w12: JP2.1 JP2.1@834.21,1555.79
PB5: JP2.3 TP_PB5.X U3.19 | length 247.7
  Top w11: U3.19 814.53,1503.47 770,1548 770,1595 JP2.3@820,1645
  Top w12: JP2.3@820,1645 JP2.3
PB6: JP2.2 TP_PB6.X U3.20 | length 139.5
  Top w11: JP2.2 720,1564 794.84,1489.16 U3.20
PB7: JP2.4 TP_PB7.X U3.21 | length 295.7
  Top w11: 700,1515 739,1515 775.16,1478.84 U3.21
  Top w12: 700,1515 670,1545 670,1595 720,1645 JP2.4
PWRIN: D1.A TP_PWRIN.X X1.2 X1.8 X1.9 | length 459.9
  Top w32: X1.2 487,300 540,300 710,130 743.39,130 D1.A
  Bottom w32: X1.2 462,325 TP_PWRIN.X 523,325 X1.2@525,327
RD+: RN3.4 U3.29 | length 259.8
  Top w11: 565,1420 629.84,1355.16 U3.29
  Top w12: RN3.4 562.76,1497.24 565,1495 565,1420
RD-: RN3.1 U3.30 | length 184.6
  Top w10: RN3.1 RN3.1@532.72,1402.76
  Top w11: RN3.1 603.86,1335.47 U3.30
RESET: C5.2 D2.A ICSP.5 POWER.3 RESET-EN.1 RESET-EN.2 RESET.3 RESET.4 RN1.4 TP_RESET.X ZU4.1 | length 5550.2
  Top w12: RESET-EN.1 1070,1095 1135,1160 C5.2
  Top w16: RESET.3 113.58,1876.42 145,1845 315,1845 345,1875 v1(350,1876.42) RESET.4 ; RESET-EN.1 RESET-EN.2 ; RN1.4 1126.57,1096.57 RESET-EN.2 ; v1(1190,1155) 1190,1135 RESET-EN.2 ; POWER.3 1280,120 1280,295 1125,450 1125,840 1145,860 1190,860 1225,895 1225,980 RESET-EN.2 ; D2.A v1(2340,975) 2310,945 1850,945 1620,1175 1400,1175 1300,1075 RESET-EN.2 ; ZU4.1 2475,885 2505.51,915.51 ICSP.5
  Bottom w10: v1(350,1876.42) 389.58,1916 395.58,1915 500,1915 595,1820 645,1820 670,1845 670,1890 701,1921 863,1921 944,1840
  Bottom w12: 944,1840 969,1815 1130,1815 1315,1630 1315,1365 1225,1275 1225,1220 1190,1185 v1(1190,1155)
  Bottom w16: v1(2340,975) 2475,840 ZU4.1
RESET2: D3.A ICSP1.5 RN1.6 TP_RESET2.X U3.24 | length 2232.3
  Top w11: 663.54,1461.46 U3.24
  Top w12: 663.54,1461.46 640,1485 640,1670 605,1705 475,1705 455,1725 455,1795 486.93,1826.93 515,1826.93 D3.A 531.93,1870 ICSP1.5 670,1920 845,1920 890,1875 v1(890,1835)
  Top w16: v1(1017,966) 1017.25,965.75 1030,955 1030.75,955.75 RN1.6
  Bottom w16: v1(890,1835) 900,1825 900,1755 940,1715 940,1665 960,1645 1005,1645 1029,1621 1029,1582 945,1498 945,1190 1030,1105 1030,979 v1(1017,966)
RXLED: RX.C U3.10 | length 191.4
  Top w11: U3.10 950.79,1315.79 985,1350 RX.C
SCK: ICSP.3 IOH.6 TP_13.X U5.5 ZU4.19 | length 4196.4
  Top w12: U5.5 666.85,856.85 710,900 935,900 990,845 v1(1060,845)
  Bottom w16: IOH.6 1140,1995 1440,1695 1440,1235 1400,1195 1370,1195 1135,960 1135,940 1060,865 v1(1060,845) 1060,825 1095,790 1095,720 1155,660 1190,660 1250,600 1525,600 1575,550 ZU4.19@1575,510 ; ZU4.19 ZU4.19@1575,510 ; ICSP.3 2445,1040 2445,975 2560,860 2560,685 2480,605 1830,605 1795,570 1635,570 ZU4.19@1575,510
SCK2: ICSP1.3 TP_SCK2.X U3.15 | length 641.4
  Top w10: ICSP1.3 750,1870 800,1820 840,1820 945,1715 945,1435 924.21,1414.21 U3.15
SS: IOH.3 TP_10.X ZU4.16 | length 1723.8
  Top w16: ZU4.16 1275,690 1326,741 1326,938 1330,942 1330,1015 v1(1320,1025)
  Bottom w16: v1(1320,1025) 1355,1060 1435,1060 1555,1180 1555,1870 1440,1985 IOH.3
TP_VUCAP: C8.1 TP_VUCAP.X U3.27 | length 363
  Top w11: C8.1 v1(590,1650) 615,1625 615,1595 ; 615,1448 668.47,1394.53 U3.27
  Top w12: 615,1448 615,1595
TXLED: TX.C U3.11 | length 220.5
  Top w11: U3.11 925.47,1335.47 1030,1440 TX.C
UGND: C8.2 GROUND.2 L1.1 TP_UGND.X U3.28 X2.4 | length 1559.4
  Top w11: 590,1435 650.16,1374.84 U3.28
  Top w12: 560,1600 590,1570 590,1435
  Top w16: C8.2 465,1625 490,1600 560,1600
  Top w24: L1.1 343.31,1771.69 C8.2
  Top w32: X2.4 255.91,1450 200,1450 175,1475 175,1583 346.31,1756.31 L1.1
  Bottom w24: TP_UGND.X 255.91,1450 X2.4
  Bottom w32: X2.4 199.21,1450.79 175,1475 175,1575 225,1625 395,1625 GROUND.2
USBVCC: F1.1 T1.1 TP_USBVCC.X U3.31 | length 834.7
  Top w11: 655,1310 660.79,1315.79 U3.31
  Top w16: T1.1 389,1044 415,1070 415,1115 390,1140 v1(390,1215) 454,1279 574,1279 605,1310 655,1310
  Top w24: F1.1@136.77,965 F1.1
  Top w32: F1.1@136.77,965 176,965 T1.1
USHIELD: L1.2 TP_USH.X X2.P$1 X2.P$2 Z1.2 Z2.2 | length 1373.4
  Top w24: v1(355,1685) 355,1680 460.63,1574.37 Z1.2 ; 435.63,1320.63 440.63,1320.63 445,1325 Z2.2
  Top w32: X2.P$2 206.85,1320.63 435.63,1320.63 ; X2.P$1 188.78,1775 L1.2
  Bottom w24: X2.P$1 201.22,1685 v1(355,1685)
  Bottom w32: X2.P$2 150,1265 105,1310 105,1690 150,1735 X2.P$1
VIN: D1.C PC1.+ POWER.8 RN1.8 TP_VIN.X U1.3 | length 3221.1
  Top w12: 582.5,742.5 600,760 600,835 690,925 945,925 977.24,892.76 RN1.8
  Top w24: U1.3 498.76,776 550,774.76 ; 500,775 550,774.76 ; 942.76,392.24 920.51,370 660,370 615,415 615,710 582.5,742.5 575,750 550,774.76 ; PC1.+ PC1.+@1005.51,450
  Top w32: D1.C 936.61,386.1 942.76,392.24 PC1.+ 1005,425 1095,335 v1(1095,315) ; POWER.8 1800,300 1825,325 v1(1900,325)
  Bottom w32: v1(1095,315) 1105,305 1860,305 1880,325 v1(1900,325)
XT1: C9.1 R1.1 TP_XT3.X U3.1 Y1.2 | length 311.3
  Top w10: R1.1 R1.1@720,1170
  Top w11: R1.1@716.1,1171.1 U3.1
  Top w12: R1.1 R1.1@716.1,1171.1
  Top w16: Y1.2 650,1050 665,1050 C9.1
  Top w24: C9.1 R1.1
XT2: C11.1 R1.2 TP_XT4.X U3.2 Y1.1 | length 316
  Top w11: 735.79,1214.21 U3.2
  Top w12: 735.79,1214.21 R1.2
  Top w16: R1.2 C11.1 840,1055 845,1050 Y1.1
XTAL1: R2.1 TP_XT1.X Y2.3 ZU4.9 | length 193
  Top w16: Y2.3 1664.37,899.37 R2.1 1675,880 ZU4.9
XTAL2: R2.2 TP_XT2.X Y2.1 ZU4.10 | length 193
  Top w16: ZU4.10 1575,880 R2.2 1585.63,899.37 Y2.1
XUSB: F1.2 TP_XUSB.X X2.1 | length 642.8
  Top w32: F1.2 98.23,1121.77 55,1165 55,1330 100,1375 300,1375 335,1410 X2.1
  Bottom w12: TP_XUSB.X 335,1450.35 X2.1
pads on no net: FD1.P$1 FD2.P$1 FD3.P$1 ORIGIN.X POWER.1 RN3.2 RN3.3 RN3.6 RN3.7 U2.4 U3.5 U3.6 U3.7 U3.12 U3.14 U3.22 U3.23 U3.25 U3.26

## Polygon pours and split planes (outlines as drawn)
GND on Bottom "Polygon_1_Net_GND" (solid, remove dead copper, pour order 2): 21,2079 2666.66,2079 2679,2066.66 2679,21 33.34,21 21,33.34 21,1189 446,1189 446,1821 21,1821
+5V on Bottom "Polygon_1_Net_+5V" (solid, pour order 1): 29,1176 431,1176 431,842.49 506,767.49 506,632.51 367.49,494 29,494
GND on Top "Polygon_2_Net_GND" (solid, remove dead copper, pour order 3): 21,2079 2679,2079 2679,21 21.02,21 15.98,1204 446,1204 446,1821 21,1821
+5V on Top "Polygon_2_Net_+5V" (solid, remove dead copper, pour order 0): 44,494 44,1181 406,1181 406,494

## Keep-outs
Top:
  region: 10,490 10,965 370,965 370,490
  region: 1625,1860 1625,1920 1670,1920 1670,1860
  region: 2480,1865 2480,1925 2525,1925 2525,1865
  region: 2380,1865 2380,1925 2425,1925 2425,1865
  region: 2280,1865 2280,1925 2325,1925 2325,1865
  region: 2175,1865 2175,1925 2220,1925 2220,1865
  region: 2080,1865 2080,1925 2125,1925 2125,1865
  region: 1975,1865 1975,1925 2020,1925 2020,1865
  region: 1875,1865 1875,1925 1920,1925 1920,1865
  region: 1765,1870 1765,1925 1815,1925 1815,1870
  region: 445,1135 445,1225 500,1225 500,1135
  region: 1985,400 1985,435 2005,435 2005,400
  region: 1885,405 1885,425 1910,425 1910,405
  region: 225,890 225,1185 290,1185 290,890
  region: 25,860 25,1185 80,1185 80,860
  region: 2415,1410 2415,1465 2550,1465 2550,1410
  region: 2475,1740 2475,1840 2530,1840 2530,1740
  region: 2375,1740 2375,1840 2430,1840 2430,1740
  region: 1585,1775 1585,1845 1875,1845 1875,1775
  region: 1525,1860 1525,1920 1570,1920 1570,1860
  region: 1420,1785 1420,1920 1465,1920 1465,1785
  region: 1320,1785 1320,1920 1365,1920 1365,1785
  region: 1220,1785 1220,1920 1265,1920 1265,1785
  region: 1120,1785 1120,1920 1165,1920 1165,1785
  region: 1000,1790 1000,1935 1065,1935 1065,1790
  region: 900,1735 900,1935 970,1935 970,1735
Bottom:
  lines w11: 30,85 75,85 75,465 30,465
Keep-Out Layer:
  the board outline again, w10

## Other copper
Top:
  text "3.325" at 2700,0 h56.1
Bottom:
  text "UNO TH Rev3e" at 47.81,142.77 h27.2 r270

## Silkscreen, mask and mechanical layers (free items; w line width, h text height)
Top Overlay:
  lines w12: 2380,1820 2400,1840 2420,1820 2390,1820 2405,1830 ; 2485,1845 2525,1845 2505,1825 2490,1840 2510,1840 ; 2505,1830 2505,1835 ; 2365,1815 2400,1850 2435,1815 2365,1815 ; 2470,1850 2505,1815 2540,1850 2470,1850
  text "SCL" at 768.83,2114.48 h47.6 r90
  text "SDA" at 878.83,2109.48 h47.6 r90
  text "M.Banzi" at -255.8,2036.76 h38.25
  text "D.Cuartielles" at -475.48,1961.76 h38.25
  text "T.Igoe" at -226.93,1914.51 h38.25
  text "G.Martino" at -335.27,1836.76 h38.25
  text "#" at 1560,1835 h37.4 r90
  text "#" at 1925,1835 h37.4 r90
  text "#" at 2020,1835 h37.4 r90
  text "#" at 2220,1835 h37.4 r90
  text "GND" at 1058.33,1807.63 h47.6 r90
  text "#" at 1365,1785 h37.4 r90
  text "#" at 1465,1785 h37.4 r90
  text "D.Mellis" at -290.66,1771.76 h38.25
  text "AREF" at 953.75,1761.04 h47.6 r90
  text "DIGITAL" at 1541.43,1748.59 h56.1
  text "TX" at 2429.83,1710.48 h47.6 r90
  text "RX" at 2530,1710 h47.6 r90
  text "[#=PWM]" at 1610,1695 h37.4
  text "TM" at 2225,1575 h34
  text "Arduino" at 1600,1500 h93.5
  text "TX" at 1179.68,1427.81 h27.2
  text "UNO" at 1600,1350 h106.25
  text "RX" at 1165,1325 h27.2
  text "www.arduino.cc" at 1280,1260 h73.1
  text "1" at 2411.28,1178.91 h42.5
  text "ANALOG IN" at 1990,240 h56.1
  text "IOREF" at 1225,175 h47.6 r90
  text "RESET" at 1310,175 h47.6 r90
  text "3V3" at 1420,170 h47.6 r90
  text "5V" at 1455,170 h47.6
  text "VIN" at 1745,170 h47.6
  text "A0" at 1968.06,170.48 h34
  text "A1" at 2068.06,170.48 h34
  text "A2" at 2168.06,170.48 h34
  text "A3" at 2268.06,170.48 h34
  text "A4" at 2368.06,170.48 h34
  text "A5" at 2468.06,170.48 h34
  text "GND" at 1575.33,169.48 h47.6
Bottom Overlay:
  text "MADE IN" at 2550,1775 h86.8
  text "designed by" at 1635,1770 h86.8
  text "tinker it" at 1550,1700 h47.6
  text "ITALY" at 2525,1675 h86.8
Top Paste:
  circle w12: c820,1670 r26.07
  circle w12: c720,1670 r26
  circle w12: c820,1570 r26.07
  circle w12: c720,1570 r26
Dimension:
  the board outline again, w10
tPlace:
  circle w10: c870,1920 r10
  lines w12: 1150,1820 1195,1775 1515,1775 ; 1935,1775 2255,1775 2300,1820
  text "ITALY" at 1695,2215 h59.5
  text "MADE IN" at 1220,2210 h59.5
  text "1" at 2417.58,1914.14 h47.6 r90
  text "9" at 1557.58,1898.28 h47.6 r90
  text "8" at 1657.58,1898.28 h47.6 r90
  text "7" at 1817.58,1898.28 h47.6 r90
  text "6" at 1917.58,1898.28 h47.6 r90
  text "5" at 2017.58,1898.28 h47.6 r90
  text "4" at 2117.58,1898.28 h47.6 r90
  text "3" at 2217.58,1898.28 h47.6 r90
  text "2" at 2317.58,1898.28 h47.6 r90
  text "0" at 2517.58,1898.28 h47.6 r90
  text "11" at 1357.58,1874.48 h47.6 r90
  text "13" at 1157.58,1858.62 h47.6 r90
  text "12" at 1257.58,1858.62 h47.6 r90
  text "10" at 1457.58,1858.62 h47.6 r90
Unrouted:
  lines w0: 1235,1405 1239,1405 ; 1235,1525 1239,1525
ReferenceLC:
  text "L" at 1165,1640 h49.6
  text "TX" at 1165,1425 h49.6
  text "ON" at 2155,1410 h77.5
  text "RX" at 1165,1325 h49.6
  text "PC1" at 705,325 h49.6
  text "PC2" at 975,325 h49.6

## Text inside footprints (layer, text, board x,y; h text height)
FRAME1: ReferenceLC "Reference Designs ARE PROVIDED \"AS IS\" AND \"WITH ALL FAULTS. Arduino SA DISCLAIMS ALL OTHER WARRANTIES, EXPRESS OR IMPLIED," at -3100,-291.28 h50.2; ReferenceLC "REGARDING PRODUCTS, INCLUDING BUT NOT LIMITED TO, ANY IMPLIED WARRANTIES OF MERCHANTABILITY OR FITNESS FOR A PARTICULAR PURPOSE" at -3100,-379.87 h50.2; ReferenceLC "Arduino SA may make changes to specifications and product descriptions at any time, without notice. The Customer must not" at -3100,-557.05 h50.2; ReferenceLC "rely on the absence or characteristics of any features or instructions marked \"reserved\" or \"undefined.\" Arduino SA reserves" at -3100,-645.64 h50.2; ReferenceLC "these for future definition and shall have no responsibility whatsoever for conflicts or incompatibilities arising from future changes to them." at -3100,-734.23 h50.2; ReferenceLC "The product information on the Web Site or Materials is subject to change without notice. Do not finalize a design with this info" at -3100,-822.82 h50.2; ReferenceLC "ARDUINO and other Arduino brands and logos and Trademarks of Arduino SA. All Arduino SA Trademarks cannot be used without owner's formal permission" at -3100,-1000 h50.2
U1: tPlace "3" at 475,725.19 h49.6 r90; tPlace "4" at 205,760 h49.6 r90; tPlace "1" at 475,549.07 h49.6 r90; tPlace "2" at 475.37,634.19 h49.6 r90
U3: tPlace "1" at 706.26,1242.95 h49.6 r90